# EAGLE board Arduino DC-Motor - Task 2  (EAGLE 9.7.0)

Size 245.25 x 94.06 mm. Coordinates in mm from the lower left corner, seen from the top.
Outline: 0,0 245.25,0 245.25,94.06 0,94.06 0,0
Copper layers (1*16): Top 0.035mm / dielectric 1.5mm / Bottom 0.035mm
Design rules "default": minimum track width 6mil, minimum drill 0.35mm, track to track 6mil, track to pad 6mil, pad to pad 6mil, via to via 6mil, smd to smd 6mil, copper to edge 40mil, drill to drill 6mil, minimum pad ring 10mil, minimum via ring 8mil, stop-mask expansion 4mil, vias tented up to drill 0mil, thermal gap 10mil

## Footprints (pad centres in the part's own frame; a part is rotated, then mirrored left to right if it is on the bottom)
BATTERY-GENERIC = drill 1.118 pad 3.15 octagon: + 2.54,0; - -2.54,0
1X08 = drill 1.016 long: 1 -8.89,0; 2 -6.35,0; 3 -3.81,0; 4 -1.27,0; 5 1.27,0; 6 3.81,0; 7 6.35,0; 8 8.89,0
MOTOR = drill 1.118 pad 3.15 octagon: + 2.54,0; - -2.54,0
ARDUINO-UNO-R3-SHIELD = drill 1.016 pad 1.88: 3.3V 24.13,-2.54; 5V 24.13,0; A0 24.13,12.7; A1 24.13,15.24; A2 24.13,17.78; A3 24.13,20.32; A4 24.13,22.86; A5 24.13,25.4; AREF -24.13,-13.97; D2 -24.13,20.32; D3 -24.13,17.78; D4 -24.13,15.24; D5 -24.13,12.7; D6 -24.13,10.16; D7 -24.13,7.62; D8 -24.13,3.81; D9 -24.13,1.27; D10 -24.13,-1.27; D11 -24.13,-3.81; D12 -24.13,-6.35; D13 -24.13,-8.89; GND@0 24.13,2.54; GND@1 24.13,5.08; GND@2 -24.13,-11.43; IOREF 24.13,-7.62; NC 24.13,-10.16; RES 24.13,-5.08; RX -24.13,25.4; SCL -24.13,-19.05; SDA -24.13,-16.51; TX -24.13,22.86; VIN 24.13,7.62
DIP762W53P254L1969H508Q16B = drill 0.743 pad 1.343: 1 -3.81,8.89; 2 -3.81,6.35; 3 -3.81,3.81; 4 -3.81,1.27; 5 -3.81,-1.27; 6 -3.81,-3.81; 7 -3.81,-6.35; 8 -3.81,-8.89; 9 3.81,-8.89; 10 3.81,-6.35; 11 3.81,-3.81; 12 3.81,-1.27; 13 3.81,1.27; 14 3.81,3.81; 15 3.81,6.35; 16 3.81,8.89

## Placement (x,y rotation side)
BAT1  9V  [BATTERY-GENERIC]  78.62,9.05 180 top
BAT4  9V  [BATTERY-GENERIC]  135.07,8.26 180 top
BAT5  9V  [BATTERY-GENERIC]  107.28,8.26 180 top
BAT6  9V  [BATTERY-GENERIC]  192.43,8.26 180 top
JP1  PINHD-1X08_1X08M  [1X08]  137.53,15.57 180 top
JP2  PINHD-1X08_1X08M  [1X08]  159.26,15.69 180 top
M1  MOTOR_HDR  [MOTOR]  217.55,85.8 270 top
M2  MOTOR_HDR  [MOTOR]  216.58,59.96 270 top
P1  BATTERYGENERIC  [BATTERY-GENERIC]  236.99,19.58 180 top
U1  ARDUINO-UNO-R3-SHIELD  [ARDUINO-UNO-R3-SHIELD]  47.88,63.47 270 top
U2  L293E  [DIP762W53P254L1969H508Q16B]  136.04,62.1 90 top

## Library data of the parts
BAT1 BAT4-BAT6 JP1 JP2 M1 M2 P1 U1 U2 = Tinkercad

## Nets
BAT1+: BAT1.+ JP1.3
BAT1-: BAT1.- JP2.2
BAT4+: BAT4.+ JP1.6
BAT4-: BAT4.- JP2.7
BAT5+: BAT5.+ JP1.8
BAT5-: BAT5.- JP2.8
BAT6+: BAT6.+ JP1.2
BAT6-: BAT6.- JP2.1
M1_+: M1.+ U2.11
M1_-: M1.- U2.14
M2_+: M2.+ U2.3
M2_-: M2.- U2.6
P1+: P1.+ U1.5V U2.8 U2.16
P1-: P1.- U1.GND@0 U1.GND@1 U1.GND@2 U2.4 U2.5 U2.12 U2.13
U1_D3: U1.D3 U2.9
U1_D4: U1.D4 U2.15
U1_D5: U1.D5 U2.10
U1_D9: U1.D9 U2.2
U1_D10: U1.D10 U2.7
U1_D11: U1.D11 U2.1

## Tracks (layer width: path | path; a pad name or v marks a point on that pad's centre or on a via)
BAT1+  (1 unrouted)
BAT1-  (1 unrouted)
BAT4+  (1 unrouted)
BAT4-  (1 unrouted)
BAT5+  (1 unrouted)
BAT5-  (1 unrouted)
BAT6+  (1 unrouted)
BAT6-  (1 unrouted)
M1_+  (1 unrouted)
M1_-  (1 unrouted)
M2_+  (1 unrouted)
M2_-  (1 unrouted)
P1+  (3 unrouted)
P1-  (7 unrouted)
U1_D3  (1 unrouted)
U1_D4  (1 unrouted)
U1_D5  (1 unrouted)
U1_D9  (1 unrouted)
U1_D10  (1 unrouted)
U1_D11  (1 unrouted)